# EAGLE board ton-fit_v2_panel (EAGLE 8.7.0), part 1 of 2
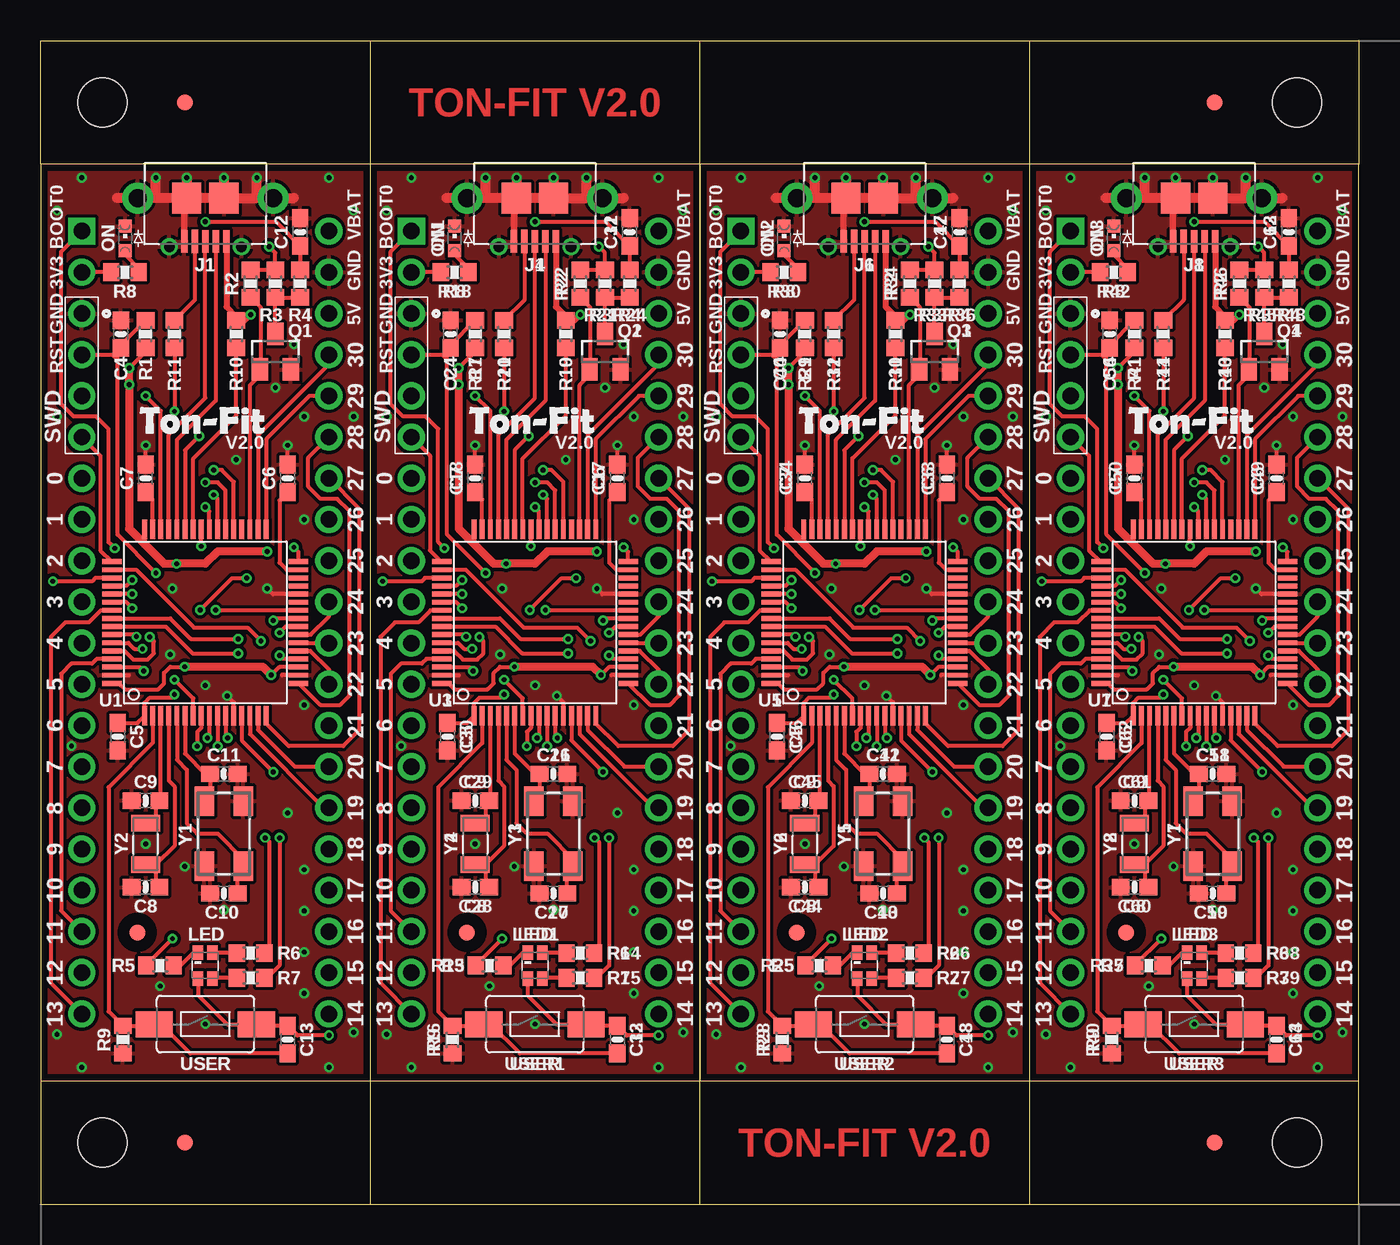
[diagram p0: board, top side]
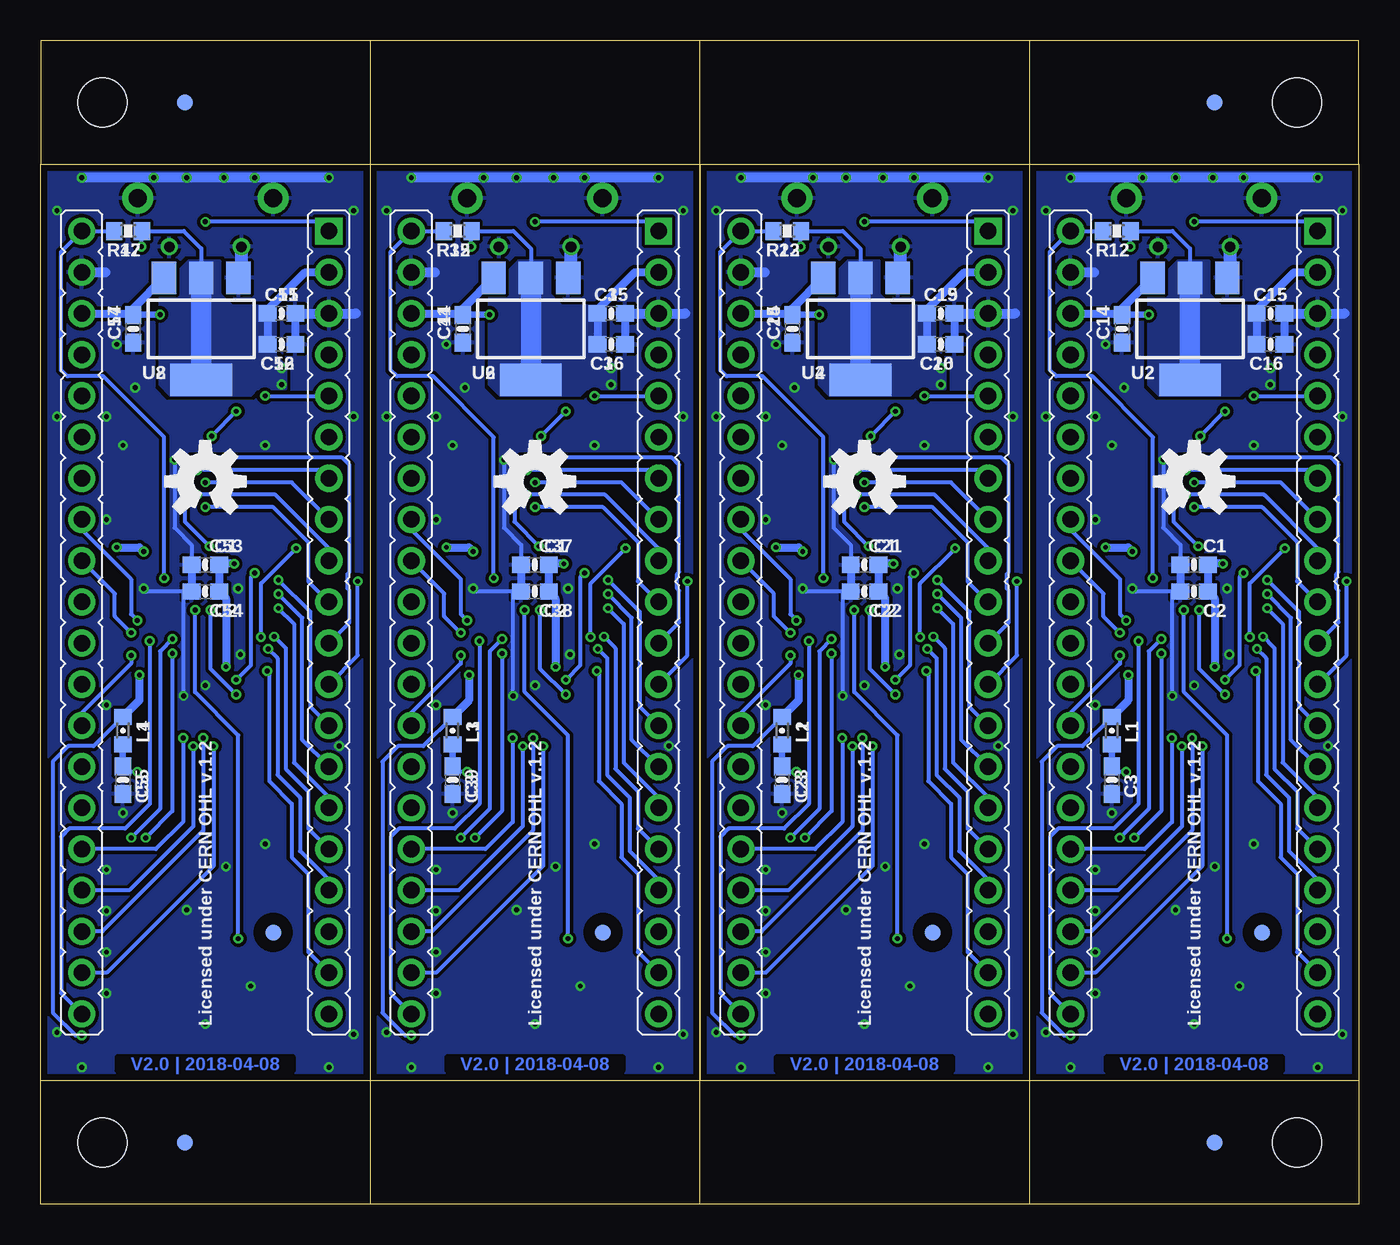
[diagram p1: board, bottom side, seen from below]

Size 81.28 x 71.75 mm. Coordinates in mm from the lower left corner, seen from the top.
Outline: 0,7.62 20.32,7.62
Outline: 20.32,64.14 0,64.14
Outline: 0,64.14 0,7.62
Outline: 20.32,7.62 40.64,7.62
Outline: 40.64,64.14 20.32,64.14
Outline: 20.32,64.14 20.32,7.62
Outline: 40.64,7.62 60.96,7.62
Outline: 60.96,64.14 40.64,64.14
Outline: 40.64,64.14 40.64,7.62
Outline: 60.96,7.62 81.28,7.62
Outline: 81.28,7.62 81.28,64.14
Outline: 81.28,64.14 60.96,64.14
Outline: 60.96,64.14 60.96,7.62
Outline: 0,7.62 0,0 20.32,0
Outline: 20.32,0 40.64,0
Outline: 40.64,0 60.96,0
Outline: 60.96,0 81.28,0 81.28,7.62
Outline: 0,64.14 0,71.75 20.32,71.75
Outline: 20.32,71.75 40.64,71.75
Outline: 40.64,71.75 60.96,71.75
Outline: 60.96,71.75 81.28,71.75 81.28,64.14
Outline: 20.32,71.75 20.32,0
Outline: 40.64,0 40.64,71.75
Outline: 60.96,71.75 60.96,0
Copper layers (1*16): Top 0.035mm / dielectric 1.5mm / Bottom 0.035mm
Design rules "default *": minimum track width 6mil, minimum drill 0.3mm, track to track 8mil, track to pad 7mil, pad to pad 6mil, via to via 7mil, smd to smd 0mil, copper to edge 16mil, drill to drill 8mil, minimum pad ring 8mil, minimum via ring 6mil, stop-mask expansion 4mil, vias tented up to drill 19mil, thermal gap 8mil
Holes 3 mm at 3.81,3.81 77.47,3.81 3.81,67.94 77.47,67.94

## Footprints (pad centres in the part's own frame; a part is rotated, then mirrored left to right if it is on the bottom)
C0603 = smd 1.1 x 1: 1 -0.85,0; 2 0.85,0
FIDUCIAL-1X2 = smd 1 x 1: 1 0,0
0475890001 = smd 0.4 x 1.4: 1 -1.3,2.675; 2 -0.65,2.675; 3 0,2.675; 4 0.65,2.675; 5 1.3,2.675 | drill 1.1 pad 1.9: SH1 -4.175,0; SH4 4.175,0 | smd 1.8 x 1.9: SH2 -1.15,0; SH3 1.15,0 | drill 0.65 pad 1.05: SH5 -2.225,3; SH6 2.225,3
DIL40 = drill 1.016 pad 1.676 square: 1 -24.13,-7.62 | drill 1.016 pad 1.676: 2 -21.59,-7.62; 3 -19.05,-7.62; 4 -16.51,-7.62; 5 -13.97,-7.62; 6 -11.43,-7.62; 7 -8.89,-7.62; 8 -6.35,-7.62; 9 -3.81,-7.62; 10 -1.27,-7.62; 11 1.27,-7.62; 12 3.81,-7.62; 13 6.35,-7.62; 14 8.89,-7.62; 15 11.43,-7.62; 16 13.97,-7.62; 17 16.51,-7.62; 18 19.05,-7.62; 19 21.59,-7.62; 20 24.13,-7.62; 21 24.13,7.62; 22 21.59,7.62; 23 19.05,7.62; 24 16.51,7.62; 25 13.97,7.62; 26 11.43,7.62; 27 8.89,7.62; 28 6.35,7.62; 29 3.81,7.62; 30 1.27,7.62; 31 -1.27,7.62; 32 -3.81,7.62; 33 -6.35,7.62; 34 -8.89,7.62; 35 -11.43,7.62; 36 -13.97,7.62; 37 -16.51,7.62; 38 -19.05,7.62; 39 -21.59,7.62; 40 -24.13,7.62
L0603 = smd 1 x 1.1: 1 -0.85,0; 2 0.85,0
0606 = smd 0.65 x 0.9: 1 -0.45,0.8; 2 0.45,0.8; 3 0.45,-0.8; 4 -0.45,-0.8
CHIPLED_0603 = smd 0.8 x 0.8: A 0,-0.75; C 0,0.75
SOT23 = smd 1 x 1.4: 1 -0.95,-1.1; 2 0.95,-1.1; 3 0,1.1
R0603 = smd 1 x 1.1: 1 -0.85,0; 2 0.85,0
LQFP64 = smd 0.3 x 1.2: 1 -3.75,-5.75; 2 -3.25,-5.75; 3 -2.75,-5.75; 4 -2.25,-5.75; 5 -1.75,-5.75; 6 -1.25,-5.75; 7 -0.75,-5.75; 8 -0.25,-5.75; 9 0.25,-5.75; 10 0.75,-5.75; 11 1.25,-5.75; 12 1.75,-5.75; 13 2.25,-5.75; 14 2.75,-5.75; 15 3.25,-5.75; 16 3.75,-5.75; 33 3.75,5.75; 34 3.25,5.75; 35 2.75,5.75; 36 2.25,5.75; 37 1.75,5.75; 38 1.25,5.75; 39 0.75,5.75; 40 0.25,5.75; 41 -0.25,5.75; 42 -0.75,5.75; 43 -1.25,5.75; 44 -1.75,5.75; 45 -2.25,5.75; 46 -2.75,5.75; 47 -3.25,5.75; 48 -3.75,5.75 | smd 1.2 x 0.3: 17 5.75,-3.75; 18 5.75,-3.25; 19 5.75,-2.75; 20 5.75,-2.25; 21 5.75,-1.75; 22 5.75,-1.25; 23 5.75,-0.75; 24 5.75,-0.25; 25 5.75,0.25; 26 5.75,0.75; 27 5.75,1.25; 28 5.75,1.75; 29 5.75,2.25; 30 5.75,2.75; 31 5.75,3.25; 32 5.75,3.75; 49 -5.75,3.75; 50 -5.75,3.25; 51 -5.75,2.75; 52 -5.75,2.25; 53 -5.75,1.75; 54 -5.75,1.25; 55 -5.75,0.75; 56 -5.75,0.25; 57 -5.75,-0.25; 58 -5.75,-0.75; 59 -5.75,-1.25; 60 -5.75,-1.75; 61 -5.75,-2.25; 62 -5.75,-2.75; 63 -5.75,-3.25; 64 -5.75,-3.75
SOT223 = smd 1.5 x 2: 1 -2.3,-3.15; 2 0,-3.15; 3 2.3,-3.15 | smd 3.8 x 2: 4 0,3.15
FSMSM = smd 2.3 x 1.6: 1 -3.15,0; 2 3.15,0
ABM3B = smd 1.8 x 1.2: 1 -2,-1.2; 2 2,-1.2; 3 2,1.2; 4 -2,1.2
3.2X1.5 = smd 1 x 1.8: 1 -1.275,0; 2 1.275,0

## Placement (x,y rotation side)
C1  1u  [C0603]  10.16,39.43 180 bottom
C2  0.1u  [C0603]  10.16,37.78 180 bottom
C3  0.1u  [C0603]  15.24,26.16 270 bottom
C4  0.1u  [C0603]  4.95,53.66 90 top
C5  0.1u  [C0603]  4.76,28.83 270 top
C6  2.2u  [C0603]  15.24,44.77 90 top
C7  2.2u  [C0603]  6.48,44.77 90 top
C8  8p2  [C0603]  6.48,19.56 0 top
C9  8p2  [C0603]  6.48,24.89 0 top
C10  8p2  [C0603]  11.3,19.18 0 top
C11  8p2  [C0603]  11.3,26.54 180 top
C12  2.2u  [C0603]  16,59.94 90 top
C13  0.1u  [C0603]  15.24,10.16 270 top
C14  1u  [C0603]  14.61,53.98 270 bottom
C15  1u  [C0603]  5.46,54.93 0 bottom
C16  0.1u  [C0603]  5.46,53.02 0 bottom
C17  2.2u  [C0603]  35.56,44.77 90 top
C18  2.2u  [C0603]  26.8,44.77 90 top
C19  1u  [C0603]  25.78,54.93 0 bottom
C20  0.1u  [C0603]  25.78,53.02 0 bottom
C21  1u  [C0603]  30.48,39.43 180 bottom
C22  0.1u  [C0603]  30.48,37.78 180 bottom
C23  0.1u  [C0603]  35.56,26.16 270 bottom
C24  0.1u  [C0603]  25.27,53.66 90 top
C25  1u  [C0603]  34.92,53.98 270 bottom
C26  8p2  [C0603]  31.62,26.54 180 top
C27  8p2  [C0603]  31.62,19.18 0 top
C28  8p2  [C0603]  26.8,19.56 0 top
C29  8p2  [C0603]  26.8,24.89 0 top
C30  0.1u  [C0603]  25.08,28.83 270 top
C31  2.2u  [C0603]  36.32,59.94 90 top
C32  0.1u  [C0603]  35.56,10.16 270 top
C33  2.2u  [C0603]  55.88,44.77 90 top
C34  2.2u  [C0603]  47.12,44.77 90 top
C35  1u  [C0603]  46.1,54.93 0 bottom
C36  0.1u  [C0603]  46.1,53.02 0 bottom
C37  1u  [C0603]  50.8,39.43 180 bottom
C38  0.1u  [C0603]  50.8,37.78 180 bottom
C39  0.1u  [C0603]  55.88,26.16 270 bottom
C40  0.1u  [C0603]  45.59,53.66 90 top
C41  1u  [C0603]  55.24,53.98 270 bottom
C42  8p2  [C0603]  51.94,26.54 180 top
C43  8p2  [C0603]  51.94,19.18 0 top
C44  8p2  [C0603]  47.12,19.56 0 top
C45  8p2  [C0603]  47.12,24.89 0 top
C46  0.1u  [C0603]  45.4,28.83 270 top
C47  2.2u  [C0603]  56.64,59.94 90 top
C48  0.1u  [C0603]  55.88,10.16 270 top
C49  2.2u  [C0603]  76.2,44.77 90 top
C50  2.2u  [C0603]  67.44,44.77 90 top
C51  1u  [C0603]  66.42,54.93 0 bottom
C52  0.1u  [C0603]  66.42,53.02 0 bottom
C53  1u  [C0603]  71.12,39.43 180 bottom
C54  0.1u  [C0603]  71.12,37.78 180 bottom
C55  0.1u  [C0603]  76.2,26.16 270 bottom
C56  0.1u  [C0603]  65.91,53.66 90 top
C57  1u  [C0603]  75.56,53.98 270 bottom
C58  8p2  [C0603]  72.26,26.54 180 top
C59  8p2  [C0603]  72.26,19.18 0 top
C60  8p2  [C0603]  67.44,19.56 0 top
C61  8p2  [C0603]  67.44,24.89 0 top
C62  0.1u  [C0603]  65.72,28.83 270 top
C63  2.2u  [C0603]  76.96,59.94 90 top
C64  0.1u  [C0603]  76.2,10.16 270 top
E$1  [FIDUCIAL-1X2]  8.89,3.81 0 top
E$2  [FIDUCIAL-1X2]  72.39,3.81 0 top
E$3  [FIDUCIAL-1X2]  72.39,67.94 0 top
E$4  [FIDUCIAL-1X2]  8.89,67.94 0 top
E$5  [FIDUCIAL-1X2]  8.89,67.94 0 bottom
E$6  [FIDUCIAL-1X2]  72.39,67.94 0 bottom
E$7  [FIDUCIAL-1X2]  72.39,3.81 0 bottom
E$8  [FIDUCIAL-1X2]  8.89,3.81 0 bottom
FIDUCIAL1  FIDUCIAL  [FIDUCIAL-1X2]  5.97,16.76 0 top
FIDUCIAL2  FIDUCIAL  [FIDUCIAL-1X2]  5.97,16.76 0 bottom
FIDUCIAL3  FIDUCIAL  [FIDUCIAL-1X2]  26.29,16.76 0 top
FIDUCIAL4  FIDUCIAL  [FIDUCIAL-1X2]  26.29,16.76 0 bottom
FIDUCIAL5  FIDUCIAL  [FIDUCIAL-1X2]  46.61,16.76 0 top
FIDUCIAL6  FIDUCIAL  [FIDUCIAL-1X2]  46.61,16.76 0 bottom
FIDUCIAL7  FIDUCIAL  [FIDUCIAL-1X2]  66.93,16.76 0 top
FIDUCIAL8  FIDUCIAL  [FIDUCIAL-1X2]  66.93,16.76 0 bottom
J1  [0475890001]  10.16,62.04 180 top
J2  [DIL40]  10.16,35.88 270 top
J3  [DIL40]  30.48,35.88 270 top
J4  [0475890001]  30.48,62.04 180 top
J5  [DIL40]  50.8,35.88 270 top
J6  [0475890001]  50.8,62.04 180 top
J7  [DIL40]  71.12,35.88 270 top
J8  [0475890001]  71.12,62.04 180 top
L1  120R@100MHz  [L0603]  15.24,29.21 270 bottom
L2  120R@100MHz  [L0603]  35.56,29.21 270 bottom
L3  120R@100MHz  [L0603]  55.88,29.21 270 bottom
L4  120R@100MHz  [L0603]  76.2,29.21 270 bottom
LED  LED-RGB-AC  [0606]  10.16,14.73 0 top
LED1  LED-RGB-AC  [0606]  30.48,14.73 0 top
LED2  LED-RGB-AC  [0606]  50.8,14.73 0 top
LED3  LED-RGB-AC  [0606]  71.12,14.73 0 top
ON  [CHIPLED_0603]  5.21,59.56 0 top
ON1  [CHIPLED_0603]  25.53,59.56 0 top
ON2  [CHIPLED_0603]  45.85,59.56 0 top
ON3  [CHIPLED_0603]  66.17,59.56 0 top
Q1  2N7002  [SOT23]  14.48,52.58 0 top
Q2  2N7002  [SOT23]  34.8,52.58 0 top
Q3  2N7002  [SOT23]  55.12,52.58 0 top
Q4  2N7002  [SOT23]  75.44,52.58 0 top
R1  47k  [R0603]  6.48,53.66 270 top
R2  47k  [R0603]  12.95,56.77 90 top
R3  470k  [R0603]  14.48,56.77 90 top
R4  47k  [R0603]  16,56.77 90 top
R5  200R  [R0603]  7.37,14.73 0 top
R6  200R  [R0603]  12.95,15.49 180 top
R7  200R  [R0603]  12.95,13.97 180 top
R8  200R  [R0603]  5.21,57.47 180 top
R9  47k  [R0603]  5.08,10.16 90 top
R10  200R  [R0603]  12.06,53.66 270 top
R11  200R  [R0603]  8.26,53.66 270 top
R12  DNP / 0R  [R0603]  14.92,60.01 180 bottom
R13  200R  [R0603]  27.69,14.73 0 top
R14  200R  [R0603]  33.27,15.49 180 top
R15  200R  [R0603]  33.27,13.97 180 top
R16  47k  [R0603]  25.4,10.16 90 top
R17  47k  [R0603]  26.8,53.66 270 top
R18  200R  [R0603]  25.53,57.47 180 top
R19  200R  [R0603]  32.38,53.66 270 top
R20  200R  [R0603]  28.57,53.66 270 top
R21  470k  [R0603]  34.8,56.77 90 top
R22  47k  [R0603]  33.27,56.77 90 top
R23  DNP / 0R  [R0603]  35.24,60.01 180 bottom
R24  47k  [R0603]  36.32,56.77 90 top
R25  200R  [R0603]  48.01,14.73 0 top
R26  200R  [R0603]  53.59,15.49 180 top
R27  200R  [R0603]  53.59,13.97 180 top
R28  47k  [R0603]  45.72,10.16 90 top
R29  47k  [R0603]  47.12,53.66 270 top
R30  200R  [R0603]  45.85,57.47 180 top
R31  200R  [R0603]  52.7,53.66 270 top
R32  200R  [R0603]  48.9,53.66 270 top
R33  470k  [R0603]  55.12,56.77 90 top
R34  47k  [R0603]  53.59,56.77 90 top
R35  DNP / 0R  [R0603]  55.56,60.01 180 bottom
R36  47k  [R0603]  56.64,56.77 90 top
R37  200R  [R0603]  68.33,14.73 0 top
R38  200R  [R0603]  73.91,15.49 180 top
R39  200R  [R0603]  73.91,13.97 180 top
R40  47k  [R0603]  66.04,10.16 90 top
R41  47k  [R0603]  67.44,53.66 270 top
R42  200R  [R0603]  66.17,57.47 180 top
R43  200R  [R0603]  73.03,53.66 270 top
R44  200R  [R0603]  69.22,53.66 270 top
R45  470k  [R0603]  75.44,56.77 90 top
R46  47k  [R0603]  73.91,56.77 90 top
R47  DNP / 0R  [R0603]  75.88,60.01 180 bottom
R48  47k  [R0603]  76.96,56.77 90 top
U1  STM32F405RGT6  [LQFP64]  10.16,35.88 0 top
U2  AZ1117-3.3  [SOT223]  10.41,53.98 180 bottom
U3  STM32F405RGT6  [LQFP64]  30.48,35.88 0 top
U4  AZ1117-3.3  [SOT223]  30.73,53.98 180 bottom
U5  STM32F405RGT6  [LQFP64]  50.8,35.88 0 top
U6  AZ1117-3.3  [SOT223]  51.05,53.98 180 bottom
U7  STM32F405RGT6  [LQFP64]  71.12,35.88 0 top
U8  AZ1117-3.3  [SOT223]  71.37,53.98 180 bottom
U$1  [OSHW-LOGO-M]  10.16,44.58 0 bottom
U$2  [OSHW-LOGO-M]  30.48,44.58 0 bottom
U$3  [OSHW-LOGO-M]  50.8,44.58 0 bottom
U$4  [OSHW-LOGO-M]  71.12,44.58 0 bottom
USER  FSMSM  [FSMSM]  10.16,11.11 0 top
USER1  FSMSM  [FSMSM]  30.48,11.11 0 top
USER2  FSMSM  [FSMSM]  50.8,11.11 0 top
USER3  FSMSM  [FSMSM]  71.12,11.11 0 top
Y1  ABM3B-8MHz  [ABM3B]  11.3,22.86 90 top
Y2  32.768kHz  [3.2X1.5]  6.48,22.23 270 top
Y3  ABM3B-8MHz  [ABM3B]  31.62,22.86 90 top
Y4  32.768kHz  [3.2X1.5]  26.8,22.23 270 top
Y5  ABM3B-8MHz  [ABM3B]  51.94,22.86 90 top
Y6  32.768kHz  [3.2X1.5]  47.12,22.23 270 top
Y7  ABM3B-8MHz  [ABM3B]  72.26,22.86 90 top
Y8  32.768kHz  [3.2X1.5]  67.44,22.23 270 top

## Library data of the parts
C1-C64 E$1-E$8 FIDUCIAL1-FIDUCIAL8 L1-L4 Q1-Q4 R1-R48 U2 U4 U6 U8 USER USER1-USER3 = Exacta-Eagle-Libraries
J1-J8 Y1-Y8 = ioton
LED LED1-LED3 = pololu
ON ON1-ON3 = led
U1 U3 U5 U7 = micro-stm_v2
U$1-U$4 = SparkFun

## Nets
0: J2.7 U1.37
1: J2.8 U1.38
2: J2.9 U1.39
3: J2.10 U1.40
4: J2.11 U1.41
5: J2.12 U1.51
6: J2.13 U1.52
7: J2.14 U1.53
8: J2.15 U1.54
9: J2.16 U1.58
10: J2.17 U1.59
11: J2.18 U1.61
12: J2.19 U1.62
13: J2.20 U1.55
14: J2.21 U1.50
15: J2.22 U1.8
16: J2.23 U1.9
17: J2.24 U1.10
18: J2.25 U1.11
19: J2.26 U1.14
20: J2.27 U1.15
21: J2.28 U1.20
22: J2.29 U1.21
23: J2.30 U1.22
24: J2.31 U1.23
25: J2.32 U1.24
26: J2.33 U1.25
27: J2.34 U1.16
28: J2.35 U1.17
29: J2.36 U1.33
30: J2.37 U1.34
31: J3.12 U3.51
32: J3.17 U3.59
33: J3.16 U3.58
34: J3.15 U3.54
35: J3.14 U3.53
36: J3.13 U3.52
37: J3.8 U3.38
38: J3.7 U3.37
39: J3.36 U3.33
40: J3.35 U3.17
41: J3.34 U3.16
42: J3.33 U3.25
43: J3.32 U3.24
44: J3.31 U3.23
45: J3.30 U3.22
46: J3.29 U3.21
47: J3.28 U3.20
48: J3.27 U3.15
49: J3.26 U3.14
50: J3.25 U3.11
51: J3.24 U3.10
52: J3.9 U3.39
53: J3.10 U3.40
54: J3.11 U3.41
55: J3.18 U3.61
56: J3.19 U3.62
57: J3.20 U3.55
58: J3.21 U3.50
59: J3.22 U3.8
60: J3.23 U3.9
61: J3.37 U3.34
62: J5.12 U5.51
63: J5.17 U5.59
64: J5.16 U5.58
65: J5.15 U5.54
66: J5.14 U5.53
67: J5.13 U5.52
68: J5.8 U5.38
69: J5.7 U5.37
70: J5.36 U5.33
71: J5.35 U5.17
72: J5.34 U5.16
73: J5.33 U5.25
74: J5.32 U5.24
75: J5.31 U5.23
76: J5.30 U5.22
77: J5.29 U5.21
78: J5.28 U5.20
79: J5.27 U5.15
80: J5.26 U5.14
81: J5.25 U5.11
82: J5.24 U5.10
83: J5.9 U5.39
84: J5.10 U5.40
85: J5.11 U5.41
86: J5.18 U5.61
87: J5.19 U5.62
88: J5.20 U5.55
89: J5.21 U5.50
90: J5.22 U5.8
91: J5.23 U5.9
92: J5.37 U5.34
93: J7.12 U7.51
94: J7.17 U7.59
95: J7.16 U7.58
96: J7.15 U7.54
97: J7.14 U7.53
98: J7.13 U7.52
99: J7.8 U7.38
100: J7.7 U7.37
101: J7.36 U7.33
102: J7.35 U7.17
103: J7.34 U7.16
104: J7.33 U7.25
105: J7.32 U7.24
106: J7.31 U7.23
107: J7.30 U7.22
108: J7.29 U7.21
109: J7.28 U7.20
110: J7.27 U7.15
111: J7.26 U7.14
112: J7.25 U7.11
113: J7.24 U7.10
114: J7.9 U7.39
115: J7.10 U7.40
116: J7.11 U7.41
117: J7.18 U7.61
118: J7.19 U7.62
119: J7.20 U7.55
120: J7.21 U7.50
121: J7.22 U7.8
122: J7.23 U7.9
123: J7.37 U7.34
+3V1: C19.1 C20.1 C21.1 C22.1 C32.1 J3.2 L2.1 LED1.4 R17.2 R18.2 R21.2 R22.2 R23.1 U3.19 U3.32 U3.48 U3.64 U4.2 U4.4 USER1.2
+3V2: C35.1 C36.1 C37.1 C38.1 C48.1 J5.2 L3.1 LED2.4 R29.2 R30.2 R33.2 R34.2 R35.1 U5.19 U5.32 U5.48 U5.64 U6.2 U6.4 USER2.2
+3V3: C1.1 C2.1 C13.1 C15.1 C16.1 J2.2 L1.1 LED.4 R1.2 R2.2 R3.2 R8.2 R12.1 U1.19 U1.32 U1.48 U1.64 U2.2 U2.4 USER.2
+3V4: C51.1 C52.1 C53.1 C54.1 C64.1 J7.2 L4.1 LED3.4 R41.2 R42.2 R45.2 R46.2 R47.1 U7.19 U7.32 U7.48 U7.64 U8.2 U8.4 USER3.2
+5V: C14.1 J1.1 J2.38 R10.1 U2.3
+5V1: C25.1 J3.38 J4.1 R19.1 U4.3
+5V2: C41.1 J5.38 J6.1 R31.1 U6.3
+5V3: C57.1 J7.38 J8.1 R43.1 U8.3
AUTO_BOOT: Q1.1 R2.1 U1.35
AUTO_BOOT1: Q2.1 R22.1 U3.35
AUTO_BOOT2: Q3.1 R34.1 U5.35
AUTO_BOOT3: Q4.1 R46.1 U7.35
BOOT0: C12.1 J2.1 R4.2 U1.60
BOOT1: C31.1 J3.1 R24.2 U3.60
BOOT2: C47.1 J5.1 R36.2 U5.60
BOOT3: C63.1 J7.1 R48.2 U7.60
GND: C1.2 C2.2 C3.2 C4.2 C5.2 C6.2 C7.2 C8.1 C9.1 C10.1 C11.1 C12.2 C14.2 C15.2 C16.2 J1.5 J1.SH1 J1.SH2 J1.SH3 J1.SH4 J1.SH5 J1.SH6 J2.3 J2.39 ON.C Q1.2 R9.1 U1.12 U1.18 U1.28 U1.63 U2.1 Y1.2 Y1.4
GND1: C17.2 C18.2 C19.2 C20.2 C21.2 C22.2 C23.2 C24.2 C25.2 C26.1 C27.1 C28.1 C29.1 C30.2 C31.2 J3.3 J3.39 J4.5 J4.SH1 J4.SH2 J4.SH3 J4.SH4 J4.SH5 J4.SH6 ON1.C Q2.2 R16.1 U3.12 U3.18 U3.28 U3.63 U4.1 Y3.2 Y3.4
GND2: C33.2 C34.2 C35.2 C36.2 C37.2 C38.2 C39.2 C40.2 C41.2 C42.1 C43.1 C44.1 C45.1 C46.2 C47.2 J5.3 J5.39 J6.5 J6.SH1 J6.SH2 J6.SH3 J6.SH4 J6.SH5 J6.SH6 ON2.C Q3.2 R28.1 U5.12 U5.18 U5.28 U5.63 U6.1 Y5.2 Y5.4
GND3: C49.2 C50.2 C51.2 C52.2 C53.2 C54.2 C55.2 C56.2 C57.2 C58.1 C59.1 C60.1 C61.1 C62.2 C63.2 J7.3 J7.39 J8.5 J8.SH1 J8.SH2 J8.SH3 J8.SH4 J8.SH5 J8.SH6 ON3.C Q4.2 R40.1 U7.12 U7.18 U7.28 U7.63 U8.1 Y7.2 Y7.4
ID: R11.2 U1.43
ID1: R20.2 U3.43
ID2: R32.2 U5.43
ID3: R44.2 U7.43
LED_B: R7.1 U1.56
LED_B1: R15.1 U3.56
LED_B2: R27.1 U5.56
LED_B3: R39.1 U7.56
LED_G: R6.1 U1.57
LED_G1: R14.1 U3.57
LED_G2: R26.1 U5.57
LED_G3: R38.1 U7.57
LED_R: R5.1 U1.26
LED_R1: R13.1 U3.26
LED_R2: R25.1 U5.26
LED_R3: R37.1 U7.26
N$1: C10.2 U1.5 Y1.1
N$2: C11.2 U1.6 Y1.3
N$3: ON.A R8.1
N$4: LED.1 R5.2
N$5: C6.1 U1.31
N$6: C7.1 U1.47
N$7: LED.2 R6.2
N$8: LED.3 R7.2
N$9: C3.1 L1.2 U1.13
N$10: C17.1 U3.31
N$11: C8.2 U1.4 Y2.2
N$12: Q1.3 R3.1 R4.1
N$13: C18.1 U3.47
N$14: LED1.1 R13.2
N$15: C9.2 U1.3 Y2.1
N$16: LED1.2 R14.2
N$17: LED1.3 R15.2
N$18: C23.1 L2.2 U3.13
N$19: ON1.A R18.1
N$20: C27.2 U3.5 Y3.1
N$21: C26.2 U3.6 Y3.3
N$22: C28.2 U3.4 Y4.2
N$24: C29.2 U3.3 Y4.1
N$25: Q2.3 R21.1 R24.1
N$26: C33.1 U5.31
N$27: C34.1 U5.47
N$28: LED2.1 R25.2
N$29: LED2.2 R26.2
N$30: LED2.3 R27.2
N$31: C39.1 L3.2 U5.13
N$32: ON2.A R30.1
N$33: C43.2 U5.5 Y5.1
N$34: C42.2 U5.6 Y5.3
N$35: C44.2 U5.4 Y6.2
N$36: C45.2 U5.3 Y6.1
N$37: Q3.3 R33.1 R36.1
N$38: C49.1 U7.31
N$39: C50.1 U7.47
N$40: LED3.1 R37.2
N$41: LED3.2 R38.2
N$42: LED3.3 R39.2
N$43: C55.1 L4.2 U7.13
N$44: ON3.A R42.1
N$45: C59.2 U7.5 Y7.1
N$46: C58.2 U7.6 Y7.3
N$47: C60.2 U7.4 Y8.2
N$48: C61.2 U7.3 Y8.1
N$49: Q4.3 R45.1 R48.1
NRST: C4.1 J2.4 R1.1 U1.7
NRST1: C24.1 J3.4 R17.1 U3.7
NRST2: C40.1 J5.4 R29.1 U5.7
NRST3: C56.1 J7.4 R41.1 U7.7
SW1: C13.2 R9.2 U1.2 USER.1
SW2: C32.2 R16.2 U3.2 USER1.1
SW3: C48.2 R28.2 U5.2 USER2.1
SW4: C64.2 R40.2 U7.2 USER3.1
SWCLK: J2.6 U1.49
SWCLK1: J3.6 U3.49
SWCLK2: J5.6 U5.49
SWCLK3: J7.6 U7.49
SWDIO: J2.5 U1.46
SWDIO1: J3.5 U3.46
SWDIO2: J5.5 U5.46
SWDIO3: J7.5 U7.46
USB_DM: J1.2 U1.44
USB_DM1: J4.2 U3.44
USB_DM2: J6.2 U5.44
USB_DM3: J8.2 U7.44
USB_DP: J1.3 U1.45
USB_DP1: J4.3 U3.45
USB_DP2: J6.3 U5.45
USB_DP3: J8.3 U7.45
USB_ID: J1.4 R11.1
USB_ID1: J4.4 R20.1
USB_ID2: J6.4 R32.1
USB_ID3: J8.4 R44.1
V_BACKUP: C5.1 J2.40 R12.2 U1.1
V_BACKUP1: C30.1 J3.40 R23.2 U3.1
V_BACKUP2: C46.1 J5.40 R35.2 U5.1
V_BACKUP3: C62.1 J7.40 R47.2 U7.1
VBUS: R10.2 U1.42
VBUS1: R19.2 U3.42
VBUS2: R31.2 U5.42
VBUS3: R43.2 U7.42